# EAGLE board improved-handheld-turbidimeter_I2C (EAGLE 7.3.0)
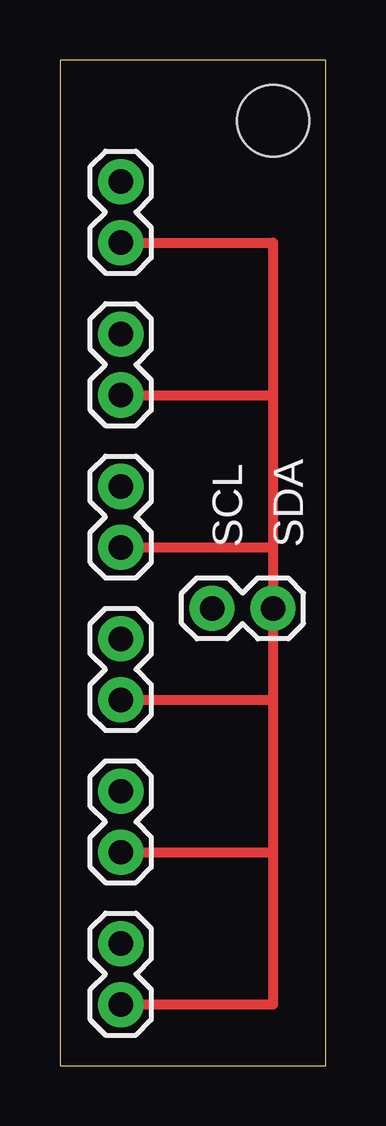
[diagram p0: board, top side]
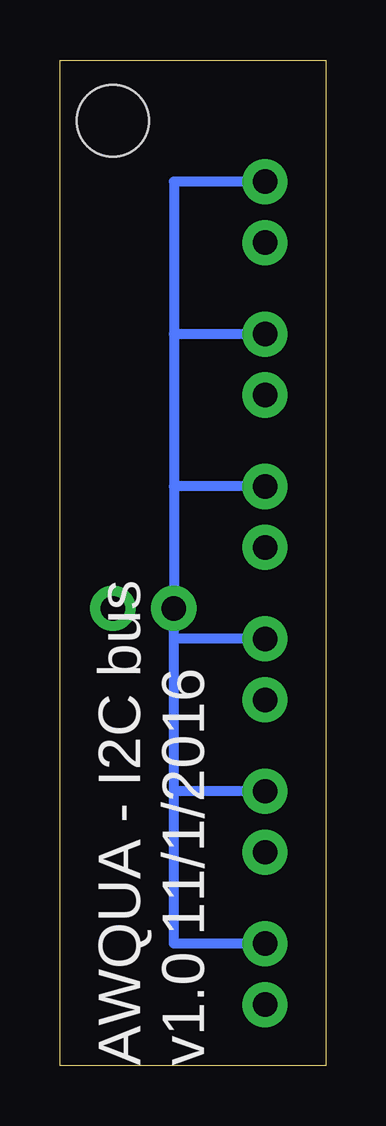
[diagram p1: board, bottom side, seen from below]

Size 11.1 x 41.9 mm. Coordinates in mm from the lower left corner, seen from the top.
Outline: 0,0 11.1,0 11.1,41.9 0,41.9 0,0
Copper layers (1*16): Top 0.035mm / dielectric 1.5mm / Bottom 0.035mm
Design rules "default": minimum track width 10mil, minimum drill 24mil, track to track 8mil, track to pad 8mil, pad to pad 8mil, via to via 8mil, smd to smd 8mil, copper to edge 40mil, drill to drill 8mil, minimum pad ring 10mil, minimum via ring 8mil, stop-mask expansion 4mil, vias tented up to drill 0mil, thermal gap 10mil
Holes 3 mm at 8.89,39.37

## Footprints (pad centres in the part's own frame; a part is rotated, then mirrored left to right if it is on the bottom)
1X02 = drill 1.016 pad 1.88: 1 0,0; 2 2.54,0

## Placement (x,y rotation side)
JP1  [1X02]  2.54,34.29 90 top
JP2  [1X02]  2.54,27.94 90 top
JP3  [1X02]  2.54,21.59 90 top
JP4  [1X02]  2.54,15.24 90 top
JP5  [1X02]  2.54,8.89 90 top
JP6  [1X02]  2.54,2.54 90 top
JP7  [1X02]  8.89,19.05 180 top

## Library data of the parts
JP1-JP7 = SparkFun-Connectors

## Nets
SCL: JP1.2 JP2.2 JP3.2 JP4.2 JP5.2 JP6.2 JP7.2
SDA: JP1.1 JP2.1 JP3.1 JP4.1 JP5.1 JP6.1 JP7.1

## Tracks (layer width: path | path; a pad name or v marks a point on that pad's centre or on a via)
SCL
  Bottom 0.406: JP1.2 6.35,36.83 6.35,30.48 | 6.35,30.48 6.35,24.13 | 6.35,24.13 JP7.2 6.35,17.78 | JP2.2 6.35,30.48 | JP4.2 6.35,17.78 | JP5.2 6.35,11.43 | 6.35,11.43 6.35,17.78 | JP6.2 6.35,5.08 6.35,11.43 | JP3.2 6.35,24.13
SDA
  Top 0.406: 8.89,15.24 JP7.1 8.89,21.59 | 8.89,15.24 8.89,8.89 | 8.89,8.89 8.89,2.54 JP6.1 | JP5.1 8.89,8.89 | JP4.1 8.89,15.24 | JP2.1 8.89,27.94 | 8.89,27.94 8.89,21.59 | JP1.1 8.89,34.29 8.89,27.94 | JP3.1 8.89,21.59

## Text on the board
tNames: SCL | SDA
bNames: AWQUA - I2C bus / v1.0 11/1/2016